# EAGLE board panel (EAGLE 7.3.0), part 1 of 2
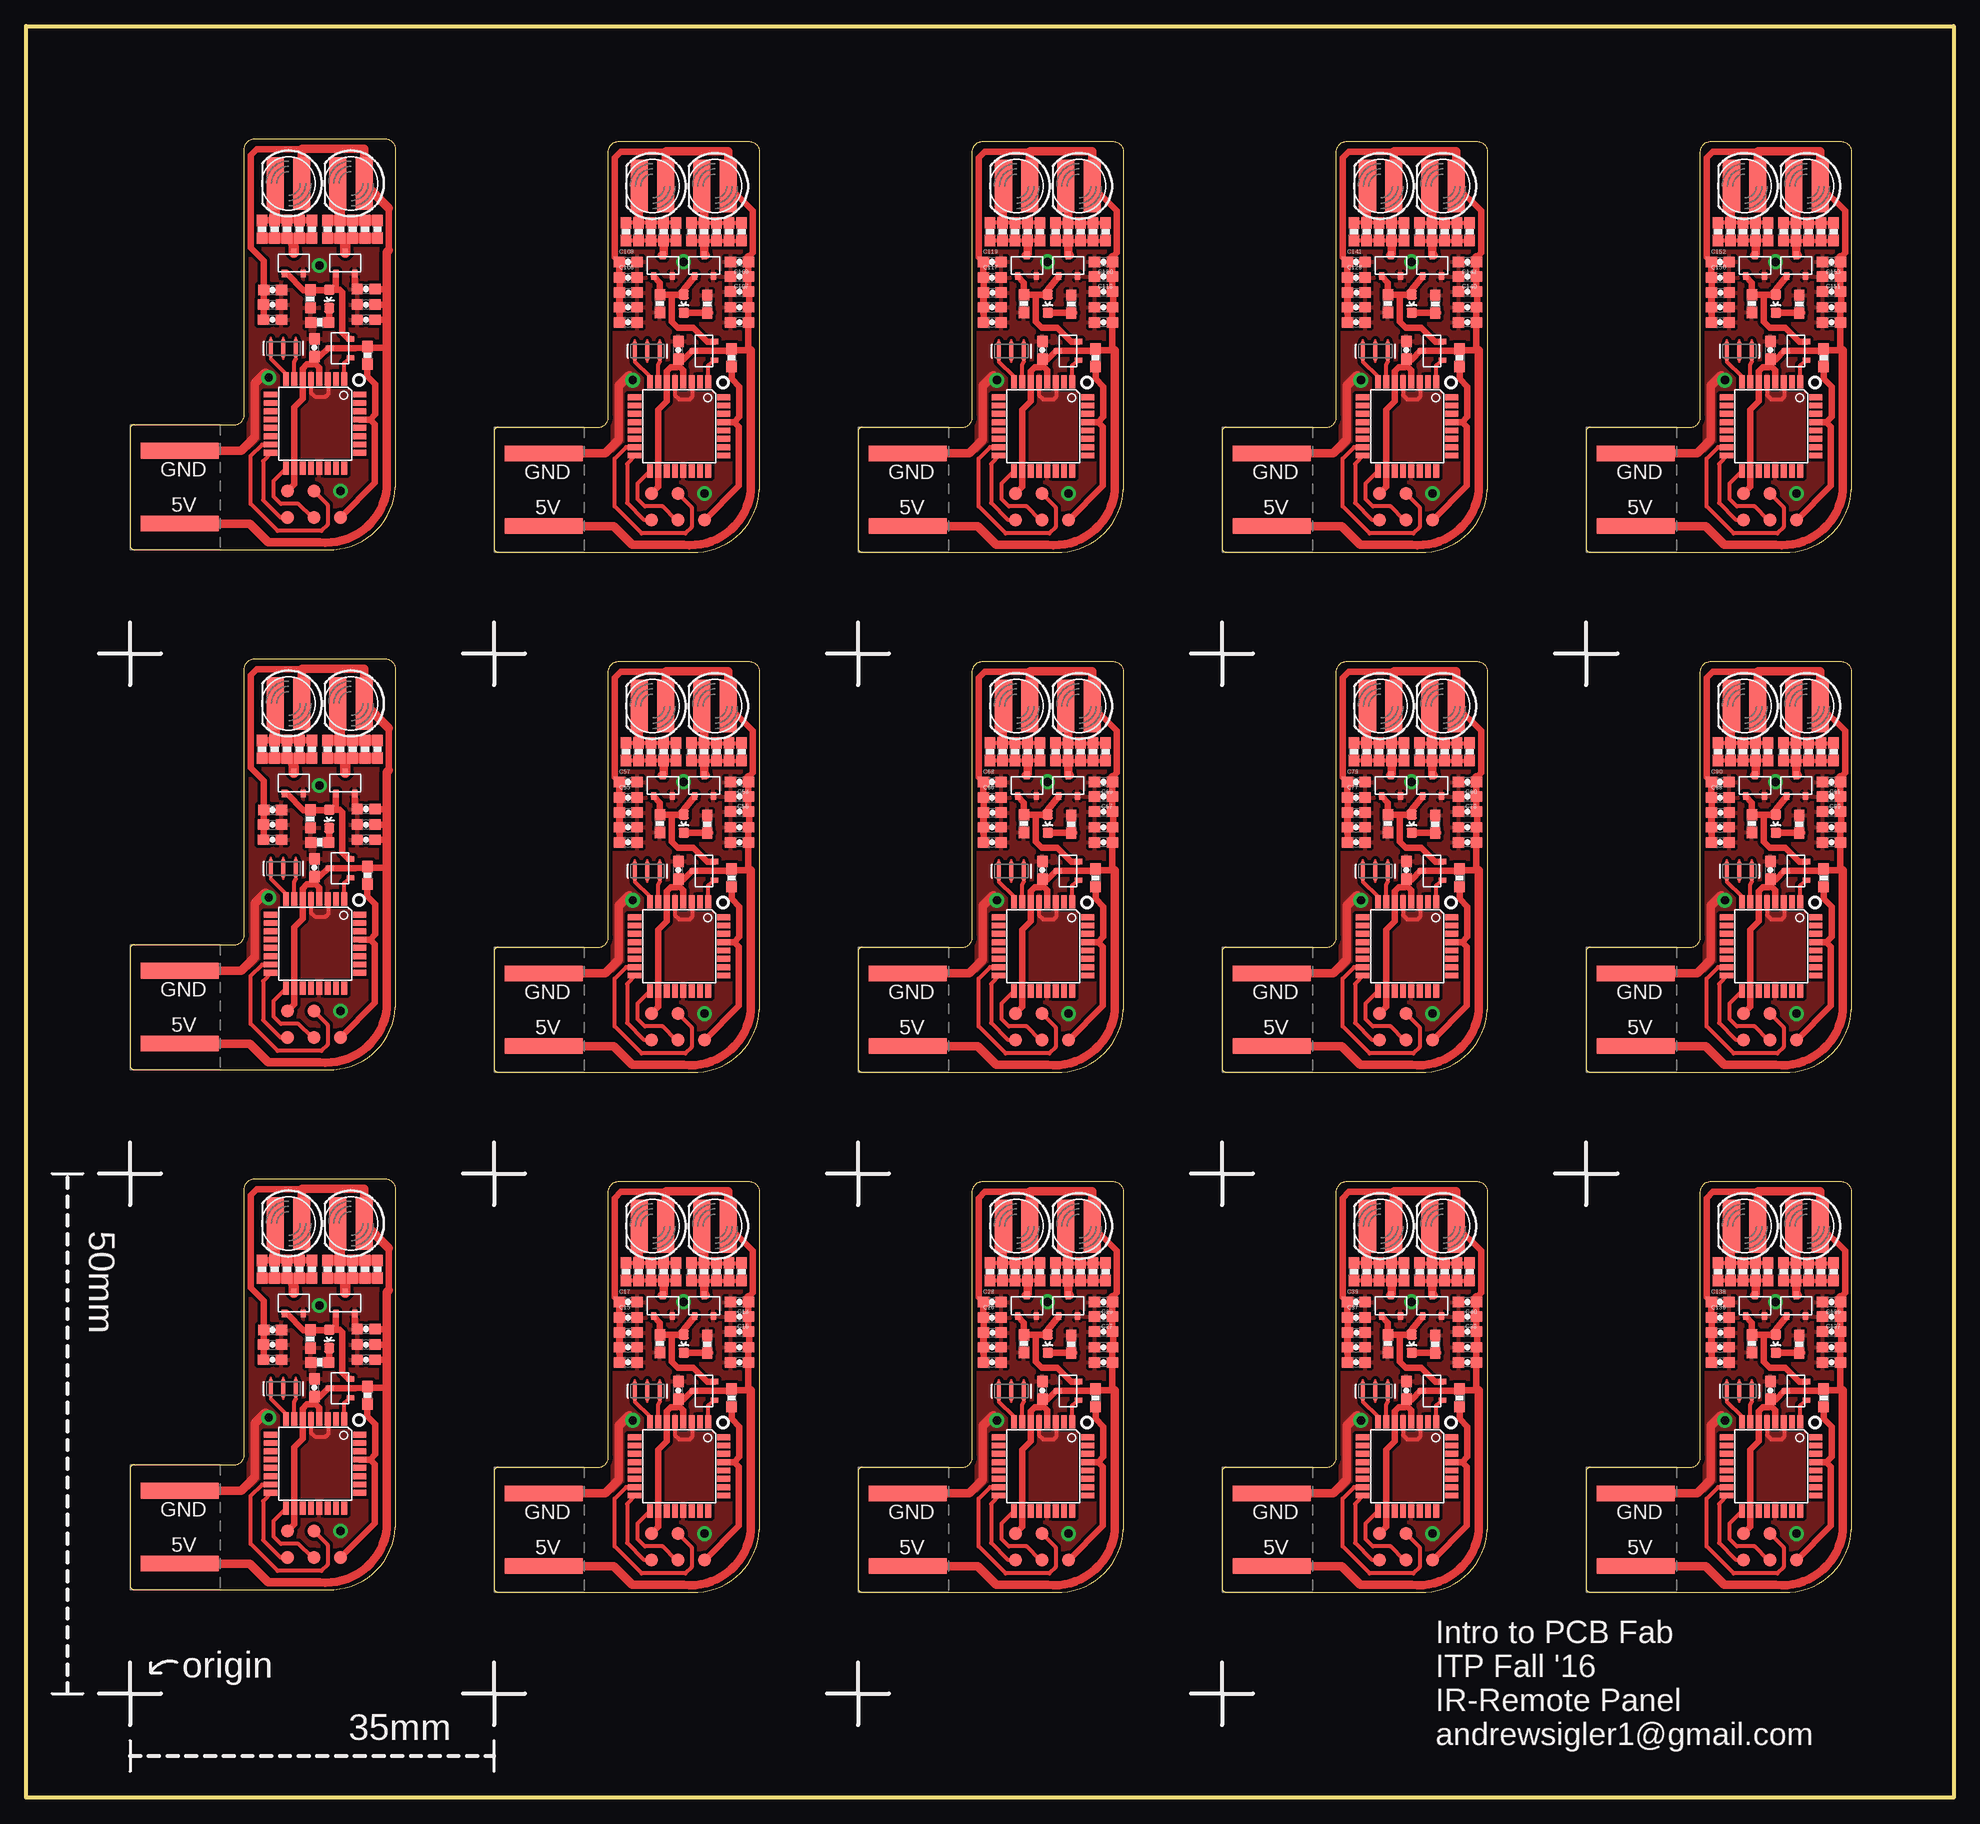
[diagram p0: board, top side]
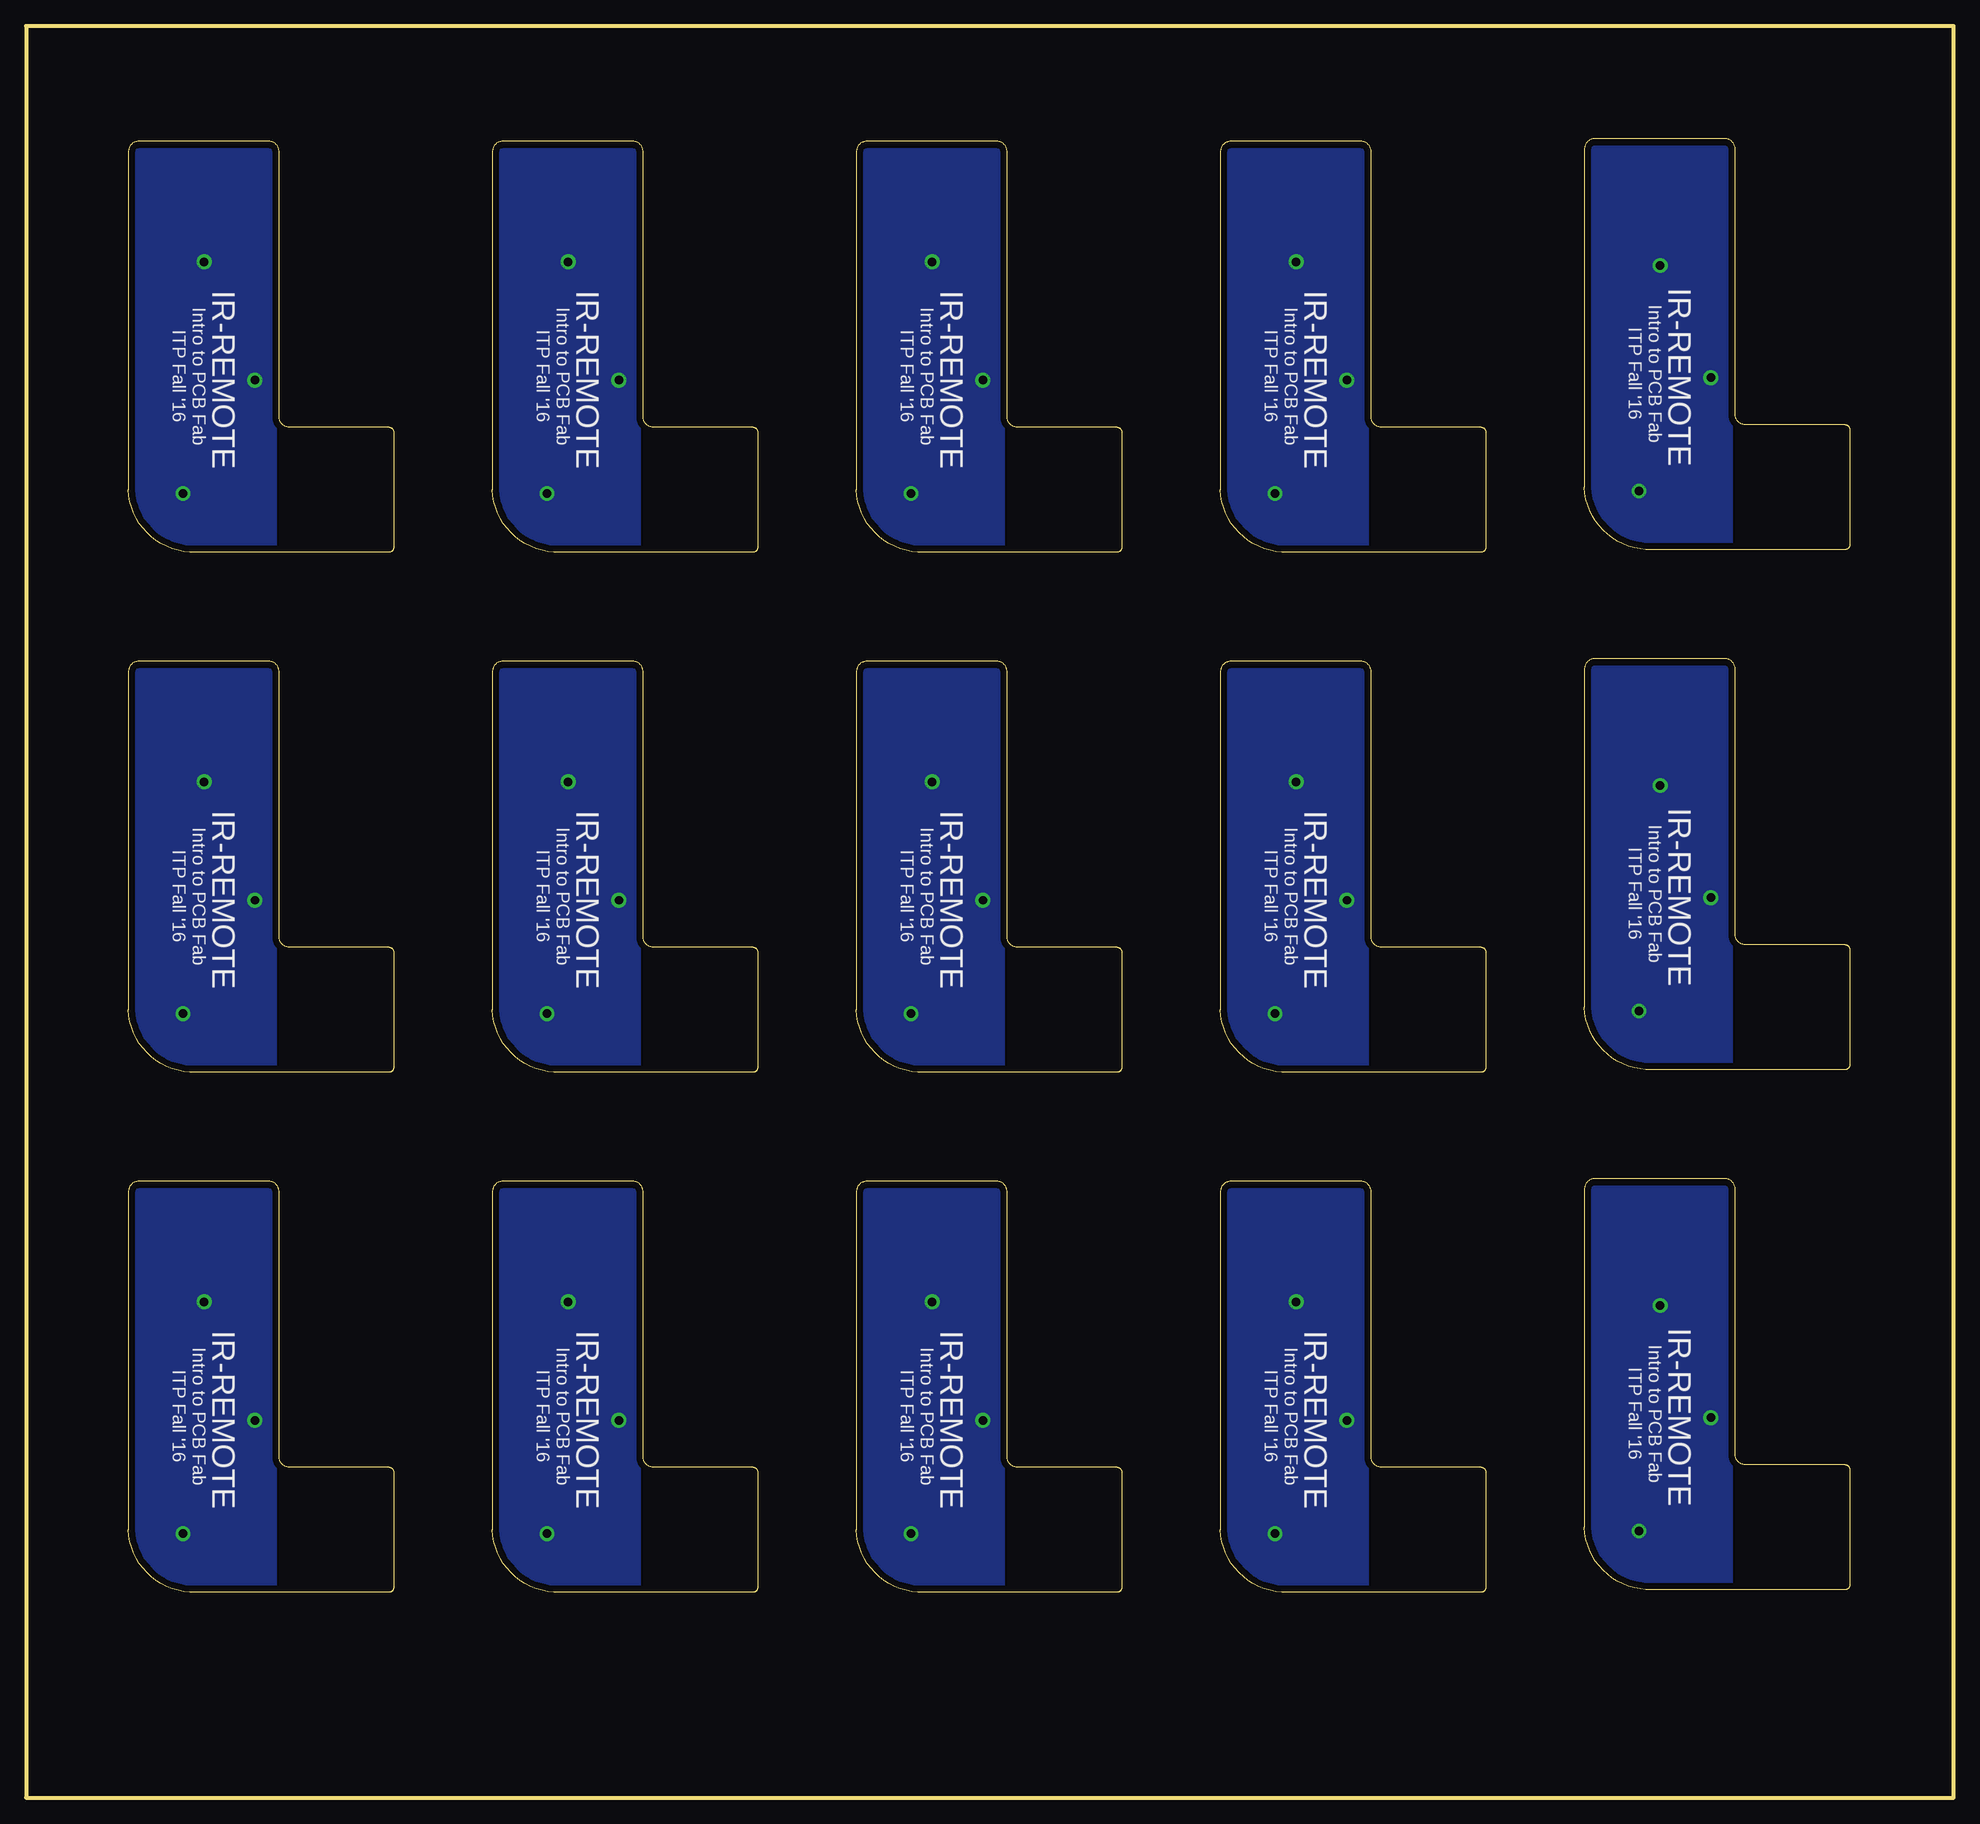
[diagram p1: board, bottom side, seen from below]

Size 185.34 x 170.34 mm. Coordinates in mm from the lower left corner, seen from the top.
Outline: 10.4,32 arc90 10,31.6 10,20.4 arc90 10.4,20 29,20 arc90 35.5,26 35.5,58.5 arc90 34.5,59.5 22,59.5 arc90 21,58.5 21,33 arc-90 20,32 10.4,32
Outline: 0,0 0,170.34 185.34,170.34 185.34,0 0,0
Outline: 45.4,31.75 arc90 45,31.35 45,20.15 arc90 45.4,19.75 64,19.75 arc90 70.5,25.75 70.5,58.25 arc90 69.5,59.25 57,59.25 arc90 56,58.25 56,32.75 arc-90 55,31.75 45.4,31.75
Outline: 80.4,31.75 arc90 80,31.35 80,20.15 arc90 80.4,19.75 99,19.75 arc90 105.5,25.75 105.5,58.25 arc90 104.5,59.25 92,59.25 arc90 91,58.25 91,32.75 arc-90 90,31.75 80.4,31.75
Outline: 115.4,31.75 arc90 115,31.35 115,20.15 arc90 115.4,19.75 134,19.75 arc90 140.5,25.75 140.5,58.25 arc90 139.5,59.25 127,59.25 arc90 126,58.25 126,32.75 arc-90 125,31.75 115.4,31.75
Outline: 150.4,31.75 arc90 150,31.35 150,20.15 arc90 150.4,19.75 169,19.75 arc90 175.5,25.75 175.5,58.25 arc90 174.5,59.25 162,59.25 arc90 161,58.25 161,32.75 arc-90 160,31.75 150.4,31.75
Outline: 10.4,82 arc90 10,81.6 10,70.4 arc90 10.4,70 29,70 arc90 35.5,76 35.5,108.5 arc90 34.5,109.5 22,109.5 arc90 21,108.5 21,83 arc-90 20,82 10.4,82
Outline: 45.4,81.75 arc90 45,81.35 45,70.15 arc90 45.4,69.75 64,69.75 arc90 70.5,75.75 70.5,108.25 arc90 69.5,109.25 57,109.25 arc90 56,108.25 56,82.75 arc-90 55,81.75 45.4,81.75
Outline: 80.4,81.75 arc90 80,81.35 80,70.15 arc90 80.4,69.75 99,69.75 arc90 105.5,75.75 105.5,108.25 arc90 104.5,109.25 92,109.25 arc90 91,108.25 91,82.75 arc-90 90,81.75 80.4,81.75
Outline: 115.4,81.75 arc90 115,81.35 115,70.15 arc90 115.4,69.75 134,69.75 arc90 140.5,75.75 140.5,108.25 arc90 139.5,109.25 127,109.25 arc90 126,108.25 126,82.75 arc-90 125,81.75 115.4,81.75
Outline: 150.4,81.75 arc90 150,81.35 150,70.15 arc90 150.4,69.75 169,69.75 arc90 175.5,75.75 175.5,108.25 arc90 174.5,109.25 162,109.25 arc90 161,108.25 161,82.75 arc-90 160,81.75 150.4,81.75
Outline: 10.4,132 arc90 10,131.6 10,120.4 arc90 10.4,120 29,120 arc90 35.5,126 35.5,158.5 arc90 34.5,159.5 22,159.5 arc90 21,158.5 21,133 arc-90 20,132 10.4,132
Outline: 45.4,131.75 arc90 45,131.35 45,120.15 arc90 45.4,119.75 64,119.75 arc90 70.5,125.75 70.5,158.25 arc90 69.5,159.25 57,159.25 arc90 56,158.25 56,132.75 arc-90 55,131.75 45.4,131.75
Outline: 80.4,131.75 arc90 80,131.35 80,120.15 arc90 80.4,119.75 99,119.75 arc90 105.5,125.75 105.5,158.25 arc90 104.5,159.25 92,159.25 arc90 91,158.25 91,132.75 arc-90 90,131.75 80.4,131.75
Outline: 115.4,131.75 arc90 115,131.35 115,120.15 arc90 115.4,119.75 134,119.75 arc90 140.5,125.75 140.5,158.25 arc90 139.5,159.25 127,159.25 arc90 126,158.25 126,132.75 arc-90 125,131.75 115.4,131.75
Outline: 150.4,131.75 arc90 150,131.35 150,120.15 arc90 150.4,119.75 169,119.75 arc90 175.5,125.75 175.5,158.25 arc90 174.5,159.25 162,159.25 arc90 161,158.25 161,132.75 arc-90 160,131.75 150.4,131.75
Copper layers (1*16): Top 0.0356mm / dielectric 1.5011mm / Bottom 0.0356mm
Design rules "LaenPCBOrder": minimum track width 6mil, minimum drill 13mil, track to track 6mil, track to pad 6mil, pad to pad 6mil, via to via 6mil, smd to smd 6mil, copper to edge 15mil, drill to drill 6mil, minimum pad ring 7mil, minimum via ring 7mil, stop-mask expansion 3mil, vias tented up to drill 0mil, thermal gap 10mil

## Footprints (pad centres in the part's own frame; a part is rotated, then mirrored left to right if it is on the bottom)
PAD.03X.05 = smd 1.27 x 1.27: P$1 0,0
0603-CAP = smd 1.1 x 1: 1 -0.85,0; 2 0.85,0
5MM-SIDE = smd 1.651 x 5.08: A -1.27,0; K 1.27,0
LED-0603 = smd 1 x 1: A 0,-0.877; C 0,0.877
SOT-23-R = smd 0.5 x 0.75: 1-BASE -0.9,-1; 2-COLLECTOR 0,1; 3-EMITTER 0.9,-1
0603-RES = smd 1.1 x 1: 1 -0.85,0; 2 0.85,0
TQFP32-08 = smd 1.27 x 0.559: 1 -4.293,2.8; 2 -4.293,2; 3 -4.293,1.2; 4 -4.293,0.4; 5 -4.293,-0.4; 6 -4.293,-1.2; 7 -4.293,-2; 8 -4.293,-2.8; 17 4.293,-2.8; 18 4.293,-2; 19 4.293,-1.2; 20 4.293,-0.4; 21 4.293,0.4; 22 4.293,1.2; 23 4.293,2; 24 4.293,2.8 | smd 0.559 x 1.27: 9 -2.8,-4.293; 10 -2,-4.293; 11 -1.2,-4.293; 12 -0.4,-4.293; 13 0.4,-4.293; 14 1.2,-4.293; 15 2,-4.293; 16 2.8,-4.293; 25 2.8,4.293; 26 2,4.293; 27 1.2,4.293; 28 0.4,4.293; 29 -0.4,4.293; 30 -1.2,4.293; 31 -2,4.293; 32 -2.8,4.293
USB-A-PCB-POWER-ONLY = smd 7.5 x 1.5: 5V -0.2,-3.5; GND -0.2,3.5
RESONATOR-SMD = smd 0.45 x 1.905: 1 -1.2,0; 2 0,0; 3 1.2,0

## Placement (x,y rotation side)
5V  [PAD.03X.05]  25.16,25.63 180 top
5V1  [PAD.03X.05]  60.16,25.38 180 top
5V2  [PAD.03X.05]  95.16,25.38 180 top
5V3  [PAD.03X.05]  130.16,25.38 180 top
5V4  [PAD.03X.05]  25.16,75.63 180 top
5V5  [PAD.03X.05]  60.16,75.38 180 top
5V6  [PAD.03X.05]  95.16,75.38 180 top
5V7  [PAD.03X.05]  130.16,75.38 180 top
5V8  [PAD.03X.05]  165.16,75.38 180 top
5V9  [PAD.03X.05]  25.16,125.63 180 top
5V10  [PAD.03X.05]  60.16,125.38 180 top
5V11  [PAD.03X.05]  95.16,125.38 180 top
5V12  [PAD.03X.05]  165.16,25.38 180 top
5V13  [PAD.03X.05]  130.16,125.38 180 top
5V14  [PAD.03X.05]  165.16,125.38 180 top
C1  4.7uF  [0603-CAP]  32.7,43.55 180 top
C2  4.7uF  [0603-CAP]  23.7,43.55 0 top
C3  4.7uF  [0603-CAP]  23.72,44.96 0 top
C4  4.7uF  [0603-CAP]  32.7,45.05 180 top
C5  4.7uF  [0603-CAP]  23.7,42.1 0 top
C6  4.7uF  [0603-CAP]  32.7,42.1 180 top
C7  0.1uF  [0603-CAP]  27.73,39.42 90 top
C8  4.7uF  [0603-CAP]  57.92,44.71 0 top
C9  0.1uF  [0603-CAP]  62.73,39.17 90 top
C10  4.7uF  [0603-CAP]  68.6,43.3 180 top
C11  4.7uF  [0603-CAP]  57.9,43.3 0 top
C12  4.7uF  [0603-CAP]  68.6,44.8 180 top
C13  4.7uF  [0603-CAP]  57.9,41.85 0 top
C14  4.7uF  [0603-CAP]  68.6,41.85 180 top
C15  4.7uF  [0603-CAP]  57.9,46.15 0 top
C16  4.7uF  [0603-CAP]  68.6,46.25 180 top
C17  4.7uF  [0603-CAP]  57.9,47.65 0 top
C18  4.7uF  [0603-CAP]  68.6,47.65 180 top
C19  4.7uF  [0603-CAP]  92.92,44.71 0 top
C20  0.1uF  [0603-CAP]  97.72,39.17 90 top
C21  4.7uF  [0603-CAP]  103.6,43.3 180 top
C22  4.7uF  [0603-CAP]  92.9,43.3 0 top
C23  4.7uF  [0603-CAP]  103.6,44.8 180 top
C24  4.7uF  [0603-CAP]  92.9,41.85 0 top
C25  4.7uF  [0603-CAP]  103.6,41.85 180 top
C26  4.7uF  [0603-CAP]  92.9,46.15 0 top
C27  4.7uF  [0603-CAP]  103.6,46.25 180 top
C28  4.7uF  [0603-CAP]  92.9,47.65 0 top
C29  4.7uF  [0603-CAP]  103.6,47.65 180 top
C30  4.7uF  [0603-CAP]  127.92,44.71 0 top
C31  0.1uF  [0603-CAP]  132.72,39.17 90 top
C32  4.7uF  [0603-CAP]  138.6,43.3 180 top
C33  4.7uF  [0603-CAP]  127.9,43.3 0 top
C34  4.7uF  [0603-CAP]  138.6,44.8 180 top
C35  4.7uF  [0603-CAP]  127.9,41.85 0 top
C36  4.7uF  [0603-CAP]  138.6,41.85 180 top
C37  4.7uF  [0603-CAP]  127.9,46.15 0 top
C38  4.7uF  [0603-CAP]  138.6,46.25 180 top
C39  4.7uF  [0603-CAP]  127.9,47.65 0 top
C40  4.7uF  [0603-CAP]  138.6,47.65 180 top
C41  4.7uF  [0603-CAP]  23.72,94.96 0 top
C42  0.1uF  [0603-CAP]  27.73,89.42 90 top
C43  4.7uF  [0603-CAP]  32.7,93.55 180 top
C44  4.7uF  [0603-CAP]  23.7,93.55 0 top
C45  4.7uF  [0603-CAP]  32.7,95.05 180 top
C46  4.7uF  [0603-CAP]  23.7,92.1 0 top
C47  4.7uF  [0603-CAP]  32.7,92.1 180 top
C48  4.7uF  [0603-CAP]  57.92,94.71 0 top
C49  0.1uF  [0603-CAP]  62.73,89.17 90 top
C50  4.7uF  [0603-CAP]  68.6,93.3 180 top
C51  4.7uF  [0603-CAP]  57.9,93.3 0 top
C52  4.7uF  [0603-CAP]  68.6,94.8 180 top
C53  4.7uF  [0603-CAP]  57.9,91.85 0 top
C54  4.7uF  [0603-CAP]  68.6,91.85 180 top
C55  4.7uF  [0603-CAP]  57.9,96.15 0 top
C56  4.7uF  [0603-CAP]  68.6,96.25 180 top
C57  4.7uF  [0603-CAP]  57.9,97.65 0 top
C58  4.7uF  [0603-CAP]  68.6,97.65 180 top
C59  4.7uF  [0603-CAP]  92.92,94.71 0 top
C60  0.1uF  [0603-CAP]  97.72,89.17 90 top
C61  4.7uF  [0603-CAP]  103.6,93.3 180 top
C62  4.7uF  [0603-CAP]  92.9,93.3 0 top
C63  4.7uF  [0603-CAP]  103.6,94.8 180 top
C64  4.7uF  [0603-CAP]  92.9,91.85 0 top
C65  4.7uF  [0603-CAP]  103.6,91.85 180 top
C66  4.7uF  [0603-CAP]  92.9,96.15 0 top
C67  4.7uF  [0603-CAP]  103.6,96.25 180 top
C68  4.7uF  [0603-CAP]  92.9,97.65 0 top
C69  4.7uF  [0603-CAP]  103.6,97.65 180 top
C70  4.7uF  [0603-CAP]  127.92,94.71 0 top
C71  0.1uF  [0603-CAP]  132.72,89.17 90 top
C72  4.7uF  [0603-CAP]  138.6,93.3 180 top
C73  4.7uF  [0603-CAP]  127.9,93.3 0 top
C74  4.7uF  [0603-CAP]  138.6,94.8 180 top
C75  4.7uF  [0603-CAP]  127.9,91.85 0 top
C76  4.7uF  [0603-CAP]  138.6,91.85 180 top
C77  4.7uF  [0603-CAP]  127.9,96.15 0 top
C78  4.7uF  [0603-CAP]  138.6,96.25 180 top
C79  4.7uF  [0603-CAP]  127.9,97.65 0 top
C80  4.7uF  [0603-CAP]  138.6,97.65 180 top
C81  4.7uF  [0603-CAP]  162.92,94.71 0 top
C82  0.1uF  [0603-CAP]  167.72,89.17 90 top
C83  4.7uF  [0603-CAP]  173.6,93.3 180 top
C84  4.7uF  [0603-CAP]  162.9,93.3 0 top
C85  4.7uF  [0603-CAP]  173.6,94.8 180 top
C86  4.7uF  [0603-CAP]  162.9,91.85 0 top
C87  4.7uF  [0603-CAP]  173.6,91.85 180 top
C88  4.7uF  [0603-CAP]  162.9,96.15 0 top
C89  4.7uF  [0603-CAP]  173.6,96.25 180 top
C90  4.7uF  [0603-CAP]  162.9,97.65 0 top
C91  4.7uF  [0603-CAP]  173.6,97.65 180 top
C92  4.7uF  [0603-CAP]  23.72,144.96 0 top
C93  0.1uF  [0603-CAP]  27.73,139.42 90 top
C94  4.7uF  [0603-CAP]  32.7,143.55 180 top
C95  4.7uF  [0603-CAP]  23.7,143.55 0 top
C96  4.7uF  [0603-CAP]  32.7,145.05 180 top
C97  4.7uF  [0603-CAP]  23.7,142.1 0 top
C98  4.7uF  [0603-CAP]  32.7,142.1 180 top
C99  4.7uF  [0603-CAP]  57.92,144.71 0 top
C100  0.1uF  [0603-CAP]  62.73,139.17 90 top
C101  4.7uF  [0603-CAP]  68.6,143.3 180 top
C102  4.7uF  [0603-CAP]  57.9,143.3 0 top
C103  4.7uF  [0603-CAP]  68.6,144.8 180 top
C104  4.7uF  [0603-CAP]  57.9,141.85 0 top
C105  4.7uF  [0603-CAP]  68.6,141.85 180 top
C106  4.7uF  [0603-CAP]  57.9,146.15 0 top
C107  4.7uF  [0603-CAP]  68.6,146.25 180 top
C108  4.7uF  [0603-CAP]  57.9,147.65 0 top
C109  4.7uF  [0603-CAP]  68.6,147.65 180 top
C110  4.7uF  [0603-CAP]  92.92,144.71 0 top
C111  0.1uF  [0603-CAP]  97.72,139.17 90 top
C112  4.7uF  [0603-CAP]  103.6,143.3 180 top
C113  4.7uF  [0603-CAP]  92.9,143.3 0 top
C114  4.7uF  [0603-CAP]  103.6,144.8 180 top
C115  4.7uF  [0603-CAP]  92.9,141.85 0 top
C116  4.7uF  [0603-CAP]  103.6,141.85 180 top
C117  4.7uF  [0603-CAP]  92.9,146.15 0 top
C118  4.7uF  [0603-CAP]  103.6,146.25 180 top
C119  4.7uF  [0603-CAP]  92.9,147.65 0 top
C120  4.7uF  [0603-CAP]  103.6,147.65 180 top
C121  4.7uF  [0603-CAP]  127.92,144.71 0 top
C122  0.1uF  [0603-CAP]  132.72,139.17 90 top
C123  4.7uF  [0603-CAP]  138.6,143.3 180 top
C124  4.7uF  [0603-CAP]  127.9,143.3 0 top
C125  4.7uF  [0603-CAP]  138.6,144.8 180 top
C126  4.7uF  [0603-CAP]  127.9,141.85 0 top
C127  4.7uF  [0603-CAP]  138.6,141.85 180 top
C128  4.7uF  [0603-CAP]  127.9,146.15 0 top
C129  4.7uF  [0603-CAP]  162.92,44.71 0 top
C130  0.1uF  [0603-CAP]  167.72,39.17 90 top
C131  4.7uF  [0603-CAP]  173.6,43.3 180 top
C132  4.7uF  [0603-CAP]  162.9,43.3 0 top
C133  4.7uF  [0603-CAP]  173.6,44.8 180 top
C134  4.7uF  [0603-CAP]  162.9,41.85 0 top
C135  4.7uF  [0603-CAP]  173.6,41.85 180 top
C136  4.7uF  [0603-CAP]  162.9,46.15 0 top
C137  4.7uF  [0603-CAP]  173.6,46.25 180 top
C138  4.7uF  [0603-CAP]  162.9,47.65 0 top
C139  4.7uF  [0603-CAP]  173.6,47.65 180 top
C140  4.7uF  [0603-CAP]  138.6,146.25 180 top
C141  4.7uF  [0603-CAP]  127.9,147.65 0 top
C142  4.7uF  [0603-CAP]  138.6,147.65 180 top
C143  4.7uF  [0603-CAP]  162.92,144.71 0 top
C144  0.1uF  [0603-CAP]  167.72,139.17 90 top
C145  4.7uF  [0603-CAP]  173.6,143.3 180 top
C146  4.7uF  [0603-CAP]  162.9,143.3 0 top
C147  4.7uF  [0603-CAP]  173.6,144.8 180 top
C148  4.7uF  [0603-CAP]  162.9,141.85 0 top
C149  4.7uF  [0603-CAP]  173.6,141.85 180 top
C150  4.7uF  [0603-CAP]  162.9,146.15 0 top
C151  4.7uF  [0603-CAP]  173.6,146.25 180 top
C152  4.7uF  [0603-CAP]  162.9,147.65 0 top
C153  4.7uF  [0603-CAP]  173.6,147.65 180 top
LED1  LED  [5MM-SIDE]  25.25,55.2 180 top
LED2  LED  [5MM-SIDE]  66.25,54.95 180 top
LED3  LED  [5MM-SIDE]  31.25,55.2 180 top
LED4  [LED-0603]  29.15,44.1 180 top
LED5  [LED-0603]  63.25,43.65 180 top
LED6  LED  [5MM-SIDE]  60.25,54.95 180 top
LED7  LED  [5MM-SIDE]  101.25,54.95 180 top
LED8  [LED-0603]  98.25,43.65 180 top
LED9  LED  [5MM-SIDE]  95.25,54.95 180 top
LED10  LED  [5MM-SIDE]  136.25,54.95 180 top
LED11  [LED-0603]  133.25,43.65 180 top
LED12  LED  [5MM-SIDE]  130.25,54.95 180 top
LED13  LED  [5MM-SIDE]  31.25,105.2 180 top
LED14  [LED-0603]  29.15,94.1 180 top
LED15  LED  [5MM-SIDE]  25.25,105.2 180 top
LED16  LED  [5MM-SIDE]  66.25,104.95 180 top
LED17  [LED-0603]  63.25,93.65 180 top
LED18  LED  [5MM-SIDE]  60.25,104.95 180 top
LED19  LED  [5MM-SIDE]  101.25,104.95 180 top
LED20  [LED-0603]  98.25,93.65 180 top
LED21  LED  [5MM-SIDE]  95.25,104.95 180 top
LED22  LED  [5MM-SIDE]  136.25,104.95 180 top
LED23  [LED-0603]  133.25,93.65 180 top
LED24  LED  [5MM-SIDE]  130.25,104.95 180 top
LED25  LED  [5MM-SIDE]  171.25,104.95 180 top
LED26  [LED-0603]  168.25,93.65 180 top
LED27  LED  [5MM-SIDE]  165.25,104.95 180 top
LED28  LED  [5MM-SIDE]  31.25,155.2 180 top
LED29  [LED-0603]  29.15,144.1 180 top
LED30  LED  [5MM-SIDE]  25.25,155.2 180 top
LED31  LED  [5MM-SIDE]  66.25,154.95 180 top
LED32  [LED-0603]  63.25,143.65 180 top
LED33  LED  [5MM-SIDE]  60.25,154.95 180 top
LED34  LED  [5MM-SIDE]  101.25,154.95 180 top
LED35  [LED-0603]  98.25,143.65 180 top
LED36  LED  [5MM-SIDE]  95.25,154.95 180 top
LED37  LED  [5MM-SIDE]  171.25,54.95 180 top
LED38  [LED-0603]  168.25,43.65 180 top
LED39  LED  [5MM-SIDE]  165.25,54.95 180 top
LED40  LED  [5MM-SIDE]  136.25,154.95 180 top
LED41  [LED-0603]  133.25,143.65 180 top
LED42  LED  [5MM-SIDE]  130.25,154.95 180 top
LED43  LED  [5MM-SIDE]  171.25,154.95 180 top
LED44  [LED-0603]  168.25,143.65 180 top
LED45  LED  [5MM-SIDE]  165.25,154.95 180 top
MISO  [PAD.03X.05]  25.16,23.09 180 top
MISO1  [PAD.03X.05]  60.16,22.84 180 top
MISO2  [PAD.03X.05]  95.16,22.84 180 top
MISO3  [PAD.03X.05]  130.16,22.84 180 top
MISO4  [PAD.03X.05]  25.16,73.09 180 top
MISO5  [PAD.03X.05]  60.16,72.84 180 top
MISO6  [PAD.03X.05]  95.16,72.84 180 top
MISO7  [PAD.03X.05]  130.16,72.84 180 top
MISO8  [PAD.03X.05]  165.16,72.84 180 top
MISO9  [PAD.03X.05]  25.16,123.09 180 top
MISO10  [PAD.03X.05]  60.16,122.84 180 top
MISO11  [PAD.03X.05]  95.16,122.84 180 top
MISO12  [PAD.03X.05]  165.16,22.84 180 top
MISO13  [PAD.03X.05]  130.16,122.84 180 top
MISO14  [PAD.03X.05]  165.16,122.84 180 top
MOSI  [PAD.03X.05]  27.7,25.63 180 top
MOSI1  [PAD.03X.05]  62.7,25.38 180 top
MOSI2  [PAD.03X.05]  97.7,25.38 180 top
MOSI3  [PAD.03X.05]  132.7,25.38 180 top
MOSI4  [PAD.03X.05]  27.7,75.63 180 top
MOSI5  [PAD.03X.05]  62.7,75.38 180 top
MOSI6  [PAD.03X.05]  97.7,75.38 180 top
MOSI7  [PAD.03X.05]  132.7,75.38 180 top
MOSI8  [PAD.03X.05]  167.7,75.38 180 top
MOSI9  [PAD.03X.05]  27.7,125.63 180 top
MOSI10  [PAD.03X.05]  62.7,125.38 180 top
MOSI11  [PAD.03X.05]  97.7,125.38 180 top
MOSI12  [PAD.03X.05]  167.7,25.38 180 top
MOSI13  [PAD.03X.05]  132.7,125.38 180 top
MOSI14  [PAD.03X.05]  167.7,125.38 180 top
Q1  [SOT-23-R]  30.2,39.35 90 top
Q2  [SOT-23-R]  25.75,47.55 0 top
Q3  [SOT-23-R]  65.2,47.3 0 top
Q4  [SOT-23-R]  61.25,47.3 0 top
Q5  [SOT-23-R]  65.2,39.1 90 top
Q6  [SOT-23-R]  100.2,47.3 0 top
Q7  [SOT-23-R]  96.25,47.3 0 top
Q8  [SOT-23-R]  100.2,39.1 90 top
Q9  [SOT-23-R]  30.7,47.55 0 top
Q10  [SOT-23-R]  135.2,47.3 0 top
Q11  [SOT-23-R]  131.25,47.3 0 top
Q12  [SOT-23-R]  135.2,39.1 90 top
Q13  [SOT-23-R]  30.7,97.55 0 top
Q14  [SOT-23-R]  25.75,97.55 0 top
Q15  [SOT-23-R]  30.2,89.35 90 top
Q16  [SOT-23-R]  65.2,97.3 0 top
Q17  [SOT-23-R]  61.25,97.3 0 top
Q18  [SOT-23-R]  65.2,89.1 90 top
Q19  [SOT-23-R]  100.2,97.3 0 top
Q20  [SOT-23-R]  96.25,97.3 0 top
Q21  [SOT-23-R]  100.2,89.1 90 top
Q22  [SOT-23-R]  135.2,97.3 0 top
Q23  [SOT-23-R]  131.25,97.3 0 top
Q24  [SOT-23-R]  135.2,89.1 90 top
Q25  [SOT-23-R]  170.2,97.3 0 top
Q26  [SOT-23-R]  166.25,97.3 0 top
Q27  [SOT-23-R]  170.2,89.1 90 top
Q28  [SOT-23-R]  30.7,147.55 0 top
Q29  [SOT-23-R]  25.75,147.55 0 top
Q30  [SOT-23-R]  30.2,139.35 90 top
Q31  [SOT-23-R]  65.2,147.3 0 top
Q32  [SOT-23-R]  61.25,147.3 0 top
Q33  [SOT-23-R]  65.2,139.1 90 top
Q34  [SOT-23-R]  100.2,147.3 0 top
Q35  [SOT-23-R]  96.25,147.3 0 top
Q36  [SOT-23-R]  100.2,139.1 90 top
Q37  [SOT-23-R]  170.2,47.3 0 top
Q38  [SOT-23-R]  166.25,47.3 0 top
Q39  [SOT-23-R]  170.2,39.1 90 top
Q40  [SOT-23-R]  135.2,147.3 0 top
Q41  [SOT-23-R]  131.25,147.3 0 top
Q42  [SOT-23-R]  135.2,139.1 90 top
Q43  [SOT-23-R]  170.2,147.3 0 top
Q44  [SOT-23-R]  166.25,147.3 0 top
Q45  [SOT-23-R]  170.2,139.1 90 top
R1  1k  [0603-RES]  28.25,41.85 0 top
R2  100  [0603-RES]  29,50.8 90 top
R3  100  [0603-RES]  30.2,50.8 90 top
R4  100  [0603-RES]  31.4,50.8 90 top
R5  10k  [0603-RES]  32.83,38.68 270 top
R6  10k  [0603-RES]  27.35,44.1 90 top
R7  100  [0603-RES]  32.6,50.8 90 top
R8  100  [0603-RES]  33.8,50.8 90 top
R9  100  [0603-RES]  27.5,50.8 90 top
R10  100  [0603-RES]  22.7,50.8 90 top
R11  100  [0603-RES]  25.1,50.8 90 top
R12  100  [0603-RES]  23.9,50.8 90 top
R13  100  [0603-RES]  26.3,50.8 90 top
R14  10k  [0603-RES]  60.95,43.65 90 top
R15  1k  [0603-RES]  65.5,43.6 270 top
R16  10k  [0603-RES]  67.83,38.43 270 top
R17  100  [0603-RES]  64,50.55 90 top
R18  100  [0603-RES]  65.2,50.55 90 top
R19  100  [0603-RES]  66.4,50.55 90 top
R20  100  [0603-RES]  67.6,50.55 90 top
R21  100  [0603-RES]  68.8,50.55 90 top
R22  100  [0603-RES]  62.5,50.55 90 top
R23  100  [0603-RES]  57.7,50.55 90 top
R24  100  [0603-RES]  60.1,50.55 90 top
R25  100  [0603-RES]  58.9,50.55 90 top
R26  100  [0603-RES]  61.3,50.55 90 top
R27  10k  [0603-RES]  95.95,43.65 90 top
R28  1k  [0603-RES]  100.5,43.6 270 top
R29  10k  [0603-RES]  102.83,38.43 270 top
R30  100  [0603-RES]  99,50.55 90 top
R31  100  [0603-RES]  100.2,50.55 90 top
R32  100  [0603-RES]  101.4,50.55 90 top
R33  100  [0603-RES]  102.6,50.55 90 top
R34  100  [0603-RES]  103.8,50.55 90 top
R35  100  [0603-RES]  97.5,50.55 90 top
R36  100  [0603-RES]  92.7,50.55 90 top
R37  100  [0603-RES]  95.1,50.55 90 top
R38  100  [0603-RES]  93.9,50.55 90 top
R39  100  [0603-RES]  96.3,50.55 90 top
R40  10k  [0603-RES]  130.95,43.65 90 top
R41  1k  [0603-RES]  135.5,43.6 270 top
R42  10k  [0603-RES]  137.83,38.43 270 top
R43  100  [0603-RES]  134,50.55 90 top
R44  100  [0603-RES]  135.2,50.55 90 top
R45  100  [0603-RES]  136.4,50.55 90 top
R46  100  [0603-RES]  137.6,50.55 90 top
R47  100  [0603-RES]  138.8,50.55 90 top
R48  100  [0603-RES]  132.5,50.55 90 top
R49  100  [0603-RES]  127.7,50.55 90 top
R50  100  [0603-RES]  130.1,50.55 90 top
R51  100  [0603-RES]  128.9,50.55 90 top
R52  100  [0603-RES]  131.3,50.55 90 top
R53  10k  [0603-RES]  27.35,94.1 90 top
R54  1k  [0603-RES]  28.25,91.85 0 top
R55  10k  [0603-RES]  32.83,88.68 270 top
R56  100  [0603-RES]  29,100.8 90 top
R57  100  [0603-RES]  30.2,100.8 90 top
R58  100  [0603-RES]  31.4,100.8 90 top
R59  100  [0603-RES]  32.6,100.8 90 top
R60  100  [0603-RES]  33.8,100.8 90 top
R61  100  [0603-RES]  27.5,100.8 90 top
R62  100  [0603-RES]  22.7,100.8 90 top
R63  100  [0603-RES]  25.1,100.8 90 top
R64  100  [0603-RES]  23.9,100.8 90 top
R65  100  [0603-RES]  26.3,100.8 90 top
R66  10k  [0603-RES]  60.95,93.65 90 top
R67  1k  [0603-RES]  65.5,93.6 270 top
R68  10k  [0603-RES]  67.83,88.43 270 top
R69  100  [0603-RES]  64,100.55 90 top
R70  100  [0603-RES]  65.2,100.55 90 top
R71  100  [0603-RES]  66.4,100.55 90 top
R72  100  [0603-RES]  67.6,100.55 90 top
R73  100  [0603-RES]  68.8,100.55 90 top
R74  100  [0603-RES]  62.5,100.55 90 top
R75  100  [0603-RES]  57.7,100.55 90 top
R76  100  [0603-RES]  60.1,100.55 90 top
R77  100  [0603-RES]  58.9,100.55 90 top
R78  100  [0603-RES]  61.3,100.55 90 top
R79  10k  [0603-RES]  95.95,93.65 90 top
R80  1k  [0603-RES]  100.5,93.6 270 top
R81  10k  [0603-RES]  102.83,88.43 270 top
R82  100  [0603-RES]  99,100.55 90 top
R83  100  [0603-RES]  100.2,100.55 90 top
R84  100  [0603-RES]  101.4,100.55 90 top
R85  100  [0603-RES]  102.6,100.55 90 top
R86  100  [0603-RES]  103.8,100.55 90 top
R87  100  [0603-RES]  97.5,100.55 90 top
R88  100  [0603-RES]  92.7,100.55 90 top
R89  100  [0603-RES]  95.1,100.55 90 top
R90  100  [0603-RES]  93.9,100.55 90 top
R91  100  [0603-RES]  96.3,100.55 90 top
R92  10k  [0603-RES]  130.95,93.65 90 top
R93  1k  [0603-RES]  135.5,93.6 270 top
R94  10k  [0603-RES]  137.83,88.43 270 top
R95  100  [0603-RES]  134,100.55 90 top
R96  100  [0603-RES]  135.2,100.55 90 top
R97  100  [0603-RES]  136.4,100.55 90 top
R98  100  [0603-RES]  137.6,100.55 90 top
R99  100  [0603-RES]  138.8,100.55 90 top
R100  100  [0603-RES]  132.5,100.55 90 top
R101  100  [0603-RES]  127.7,100.55 90 top
R102  100  [0603-RES]  130.1,100.55 90 top
R103  100  [0603-RES]  128.9,100.55 90 top
R104  100  [0603-RES]  131.3,100.55 90 top
R105  10k  [0603-RES]  165.95,93.65 90 top
R106  1k  [0603-RES]  170.5,93.6 270 top
R107  10k  [0603-RES]  172.83,88.43 270 top
R108  100  [0603-RES]  169,100.55 90 top
R109  100  [0603-RES]  170.2,100.55 90 top
R110  100  [0603-RES]  171.4,100.55 90 top
R111  100  [0603-RES]  172.6,100.55 90 top
R112  100  [0603-RES]  173.8,100.55 90 top
R113  100  [0603-RES]  167.5,100.55 90 top
R114  100  [0603-RES]  162.7,100.55 90 top
R115  100  [0603-RES]  165.1,100.55 90 top
R116  100  [0603-RES]  163.9,100.55 90 top
R117  100  [0603-RES]  166.3,100.55 90 top
R118  10k  [0603-RES]  27.35,144.1 90 top
R119  1k  [0603-RES]  28.25,141.85 0 top
R120  10k  [0603-RES]  32.83,138.68 270 top
R121  100  [0603-RES]  29,150.8 90 top
R122  100  [0603-RES]  30.2,150.8 90 top
R123  100  [0603-RES]  31.4,150.8 90 top
R124  100  [0603-RES]  32.6,150.8 90 top
R125  100  [0603-RES]  33.8,150.8 90 top
R126  100  [0603-RES]  27.5,150.8 90 top
R127  100  [0603-RES]  22.7,150.8 90 top
R128  100  [0603-RES]  25.1,150.8 90 top
R129  100  [0603-RES]  23.9,150.8 90 top
R130  100  [0603-RES]  26.3,150.8 90 top
R131  10k  [0603-RES]  60.95,143.65 90 top
R132  1k  [0603-RES]  65.5,143.6 270 top
R133  10k  [0603-RES]  67.83,138.43 270 top
R134  100  [0603-RES]  64,150.55 90 top
R135  100  [0603-RES]  65.2,150.55 90 top
R136  100  [0603-RES]  66.4,150.55 90 top
R137  100  [0603-RES]  67.6,150.55 90 top
R138  100  [0603-RES]  68.8,150.55 90 top
R139  100  [0603-RES]  62.5,150.55 90 top
R140  100  [0603-RES]  57.7,150.55 90 top
R141  100  [0603-RES]  60.1,150.55 90 top
R142  100  [0603-RES]  58.9,150.55 90 top
R143  100  [0603-RES]  61.3,150.55 90 top
R144  10k  [0603-RES]  95.95,143.65 90 top
R145  1k  [0603-RES]  100.5,143.6 270 top
R146  10k  [0603-RES]  102.83,138.43 270 top
R147  100  [0603-RES]  99,150.55 90 top
R148  100  [0603-RES]  100.2,150.55 90 top
R149  100  [0603-RES]  101.4,150.55 90 top
R150  100  [0603-RES]  102.6,150.55 90 top
R151  100  [0603-RES]  103.8,150.55 90 top
R152  100  [0603-RES]  97.5,150.55 90 top
R153  100  [0603-RES]  92.7,150.55 90 top
R154  100  [0603-RES]  95.1,150.55 90 top
R155  100  [0603-RES]  93.9,150.55 90 top
R156  100  [0603-RES]  96.3,150.55 90 top
R157  10k  [0603-RES]  165.95,43.65 90 top
R158  1k  [0603-RES]  170.5,43.6 270 top
R159  10k  [0603-RES]  172.83,38.43 270 top
R160  100  [0603-RES]  169,50.55 90 top
R161  100  [0603-RES]  170.2,50.55 90 top
R162  100  [0603-RES]  171.4,50.55 90 top
R163  100  [0603-RES]  172.6,50.55 90 top
R164  100  [0603-RES]  173.8,50.55 90 top
R165  100  [0603-RES]  167.5,50.55 90 top
R166  100  [0603-RES]  162.7,50.55 90 top
R167  100  [0603-RES]  165.1,50.55 90 top
R168  100  [0603-RES]  163.9,50.55 90 top
R169  100  [0603-RES]  166.3,50.55 90 top
R170  10k  [0603-RES]  130.95,143.65 90 top
R171  1k  [0603-RES]  135.5,143.6 270 top
R172  10k  [0603-RES]  137.83,138.43 270 top
R173  100  [0603-RES]  134,150.55 90 top
R174  100  [0603-RES]  135.2,150.55 90 top
R175  100  [0603-RES]  136.4,150.55 90 top
R176  100  [0603-RES]  137.6,150.55 90 top
R177  100  [0603-RES]  138.8,150.55 90 top
R178  100  [0603-RES]  132.5,150.55 90 top
R179  100  [0603-RES]  127.7,150.55 90 top
R180  100  [0603-RES]  130.1,150.55 90 top
R181  100  [0603-RES]  128.9,150.55 90 top
R182  100  [0603-RES]  131.3,150.55 90 top
R183  10k  [0603-RES]  165.95,143.65 90 top
R184  1k  [0603-RES]  170.5,143.6 270 top
R185  10k  [0603-RES]  172.83,138.43 270 top
R186  100  [0603-RES]  169,150.55 90 top
R187  100  [0603-RES]  170.2,150.55 90 top
R188  100  [0603-RES]  171.4,150.55 90 top
R189  100  [0603-RES]  172.6,150.55 90 top
R190  100  [0603-RES]  173.8,150.55 90 top
R191  100  [0603-RES]  167.5,150.55 90 top
R192  100  [0603-RES]  162.7,150.55 90 top
R193  100  [0603-RES]  165.1,150.55 90 top
R194  100  [0603-RES]  163.9,150.55 90 top
R195  100  [0603-RES]  166.3,150.55 90 top
RST  [PAD.03X.05]  30.24,23.09 180 top
RST1  [PAD.03X.05]  65.24,22.84 180 top
RST2  [PAD.03X.05]  100.24,22.84 180 top
RST3  [PAD.03X.05]  135.24,22.84 180 top
RST4  [PAD.03X.05]  30.24,73.09 180 top
RST5  [PAD.03X.05]  65.24,72.84 180 top
RST6  [PAD.03X.05]  100.24,72.84 180 top
RST7  [PAD.03X.05]  135.24,72.84 180 top
RST8  [PAD.03X.05]  170.24,72.84 180 top
RST9  [PAD.03X.05]  30.24,123.09 180 top
RST10  [PAD.03X.05]  65.24,122.84 180 top
RST11  [PAD.03X.05]  100.24,122.84 180 top
RST12  [PAD.03X.05]  170.24,22.84 180 top
RST13  [PAD.03X.05]  135.24,122.84 180 top
RST14  [PAD.03X.05]  170.24,122.84 180 top
SCK  [PAD.03X.05]  27.7,23.09 180 top
SCK1  [PAD.03X.05]  62.7,22.84 180 top
SCK2  [PAD.03X.05]  97.7,22.84 180 top
SCK3  [PAD.03X.05]  132.7,22.84 180 top
SCK4  [PAD.03X.05]  27.7,73.09 180 top
SCK5  [PAD.03X.05]  62.7,72.84 180 top
SCK6  [PAD.03X.05]  97.7,72.84 180 top
SCK7  [PAD.03X.05]  132.7,72.84 180 top
SCK8  [PAD.03X.05]  167.7,72.84 180 top
SCK9  [PAD.03X.05]  27.7,123.09 180 top
SCK10  [PAD.03X.05]  62.7,122.84 180 top
SCK11  [PAD.03X.05]  97.7,122.84 180 top
SCK12  [PAD.03X.05]  167.7,22.84 180 top
SCK13  [PAD.03X.05]  132.7,122.84 180 top
SCK14  [PAD.03X.05]  167.7,122.84 180 top
U1  ATMEGA328P  [TQFP32-08]  27.8,32.1 270 top
U2  ATMEGA328P  [TQFP32-08]  62.8,31.85 270 top
U3  ATMEGA328P  [TQFP32-08]  97.8,31.85 270 top
U4  ATMEGA328P  [TQFP32-08]  132.8,31.85 270 top
U5  ATMEGA328P  [TQFP32-08]  27.8,82.1 270 top
U6  ATMEGA328P  [TQFP32-08]  62.8,81.85 270 top
U7  ATMEGA328P  [TQFP32-08]  97.8,81.85 270 top
U8  ATMEGA328P  [TQFP32-08]  132.8,81.85 270 top
U9  ATMEGA328P  [TQFP32-08]  167.8,81.85 270 top
U10  ATMEGA328P  [TQFP32-08]  27.8,132.1 270 top
U11  ATMEGA328P  [TQFP32-08]  62.8,131.85 270 top
U12  ATMEGA328P  [TQFP32-08]  97.8,131.85 270 top
U13  ATMEGA328P  [TQFP32-08]  167.8,31.85 270 top
U14  ATMEGA328P  [TQFP32-08]  132.8,131.85 270 top
U15  ATMEGA328P  [TQFP32-08]  167.8,131.85 270 top
U$1  USB-POWER-ONLY  [USB-A-PCB-POWER-ONLY]  15,26 0 top
U$2  USB-POWER-ONLY  [USB-A-PCB-POWER-ONLY]  50,25.75 0 top
U$3  USB-POWER-ONLY  [USB-A-PCB-POWER-ONLY]  85,25.75 0 top
U$4  USB-POWER-ONLY  [USB-A-PCB-POWER-ONLY]  120,25.75 0 top
U$5  USB-POWER-ONLY  [USB-A-PCB-POWER-ONLY]  15,76 0 top
U$6  USB-POWER-ONLY  [USB-A-PCB-POWER-ONLY]  50,75.75 0 top
U$7  USB-POWER-ONLY  [USB-A-PCB-POWER-ONLY]  85,75.75 0 top
U$8  USB-POWER-ONLY  [USB-A-PCB-POWER-ONLY]  120,75.75 0 top
U$9  USB-POWER-ONLY  [USB-A-PCB-POWER-ONLY]  155,75.75 0 top
U$10  USB-POWER-ONLY  [USB-A-PCB-POWER-ONLY]  15,126 0 top
U$11  USB-POWER-ONLY  [USB-A-PCB-POWER-ONLY]  50,125.75 0 top
U$12  USB-POWER-ONLY  [USB-A-PCB-POWER-ONLY]  85,125.75 0 top
U$13  USB-POWER-ONLY  [USB-A-PCB-POWER-ONLY]  155,25.75 0 top
U$14  USB-POWER-ONLY  [USB-A-PCB-POWER-ONLY]  120,125.75 0 top
U$15  USB-POWER-ONLY  [USB-A-PCB-POWER-ONLY]  155,125.75 0 top
Y1  18MHZ  [RESONATOR-SMD]  24.75,39.34 180 top
Y2  18MHZ  [RESONATOR-SMD]  59.75,39.09 180 top
Y3  18MHZ  [RESONATOR-SMD]  94.75,39.09 180 top
Y4  18MHZ  [RESONATOR-SMD]  129.75,39.09 180 top
Y5  18MHZ  [RESONATOR-SMD]  24.75,89.34 180 top
Y6  18MHZ  [RESONATOR-SMD]  59.75,89.09 180 top
Y7  18MHZ  [RESONATOR-SMD]  94.75,89.09 180 top
Y8  18MHZ  [RESONATOR-SMD]  129.75,89.09 180 top
Y9  18MHZ  [RESONATOR-SMD]  164.75,89.09 180 top
Y10  18MHZ  [RESONATOR-SMD]  24.75,139.34 180 top
Y11  18MHZ  [RESONATOR-SMD]  59.75,139.09 180 top
Y12  18MHZ  [RESONATOR-SMD]  94.75,139.09 180 top
Y13  18MHZ  [RESONATOR-SMD]  164.75,39.09 180 top
Y14  18MHZ  [RESONATOR-SMD]  129.75,139.09 180 top
Y15  18MHZ  [RESONATOR-SMD]  164.75,139.09 180 top

## Library data of the parts
5V 5V1-5V14 MISO MISO1-MISO14 MOSI MOSI1-MOSI14 RST RST1-RST14 SCK SCK1-SCK14 = SparkFun-Passives
C1-C153 LED4 LED5 LED8 LED11 LED14 LED17 LED20 LED23 LED26 LED29 LED32 LED35 LED38 LED41 LED44 R1-R195 = homemade-hardware
LED1-LED3 LED6 LED7 LED9 LED10 LED12 LED13 LED15 LED16 LED18 LED19 LED21 LED22 LED24 LED25 LED27 LED28 LED30 LED31 LED33 LED34 LED36 LED37 LED39 LED40 LED42 LED43 LED45 = tvbgone
Q1-Q45 = Tomorrow_Lab_LLC
U1-U15 = SparkFun-DigitalIC; PROD_ID: IC-09069
U$1-U$15 = Andy_Sigler
Y1-Y15 = homemade-hardware; PROD_ID: XTAL-08895

## Nets
GND: C1.2 C2.2 C3.2 C4.2 C5.2 C6.2 C7.2 Q2.3-EMITTER Q9.3-EMITTER R1.1 R6.1 U1.3 U1.5 U1.21 U$1.GND Y1.2
GND2: C129.2 C130.2 C131.2 C132.2 C133.2 C134.2 C135.2 C136.2 C137.2 C138.2 C139.2 Q37.3-EMITTER Q38.3-EMITTER R157.1 R158.1 U13.3 U13.5 U13.21 U$13.GND Y13.2
GND3: C41.2 C42.2 C43.2 C44.2 C45.2 C46.2 C47.2 Q13.3-EMITTER Q14.3-EMITTER R53.1 R54.1 U5.3 U5.5 U5.21 U$5.GND Y5.2
GND4: C48.2 C49.2 C50.2 C51.2 C52.2 C53.2 C54.2 C55.2 C56.2 C57.2 C58.2 Q16.3-EMITTER Q17.3-EMITTER R66.1 R67.1 U6.3 U6.5 U6.21 U$6.GND Y6.2
GND5: C59.2 C60.2 C61.2 C62.2 C63.2 C64.2 C65.2 C66.2 C67.2 C68.2 C69.2 Q19.3-EMITTER Q20.3-EMITTER R79.1 R80.1 U7.3 U7.5 U7.21 U$7.GND Y7.2
GND6: C70.2 C71.2 C72.2 C73.2 C74.2 C75.2 C76.2 C77.2 C78.2 C79.2 C80.2 Q22.3-EMITTER Q23.3-EMITTER R92.1 R93.1 U8.3 U8.5 U8.21 U$8.GND Y8.2
GND7: C81.2 C82.2 C83.2 C84.2 C85.2 C86.2 C87.2 C88.2 C89.2 C90.2 C91.2 Q25.3-EMITTER Q26.3-EMITTER R105.1 R106.1 U9.3 U9.5 U9.21 U$9.GND Y9.2
GND8: C92.2 C93.2 C94.2 C95.2 C96.2 C97.2 C98.2 Q28.3-EMITTER Q29.3-EMITTER R118.1 R119.1 U10.3 U10.5 U10.21 U$10.GND Y10.2
GND9: C99.2 C100.2 C101.2 C102.2 C103.2 C104.2 C105.2 C106.2 C107.2 C108.2 C109.2 Q31.3-EMITTER Q32.3-EMITTER R131.1 R132.1 U11.3 U11.5 U11.21 U$11.GND Y11.2
GND10: C110.2 C111.2 C112.2 C113.2 C114.2 C115.2 C116.2 C117.2 C118.2 C119.2 C120.2 Q34.3-EMITTER Q35.3-EMITTER R144.1 R145.1 U12.3 U12.5 U12.21 U$12.GND Y12.2
GND11: C121.2 C122.2 C123.2 C124.2 C125.2 C126.2 C127.2 C128.2 C140.2 C141.2 C142.2 Q40.3-EMITTER Q41.3-EMITTER R170.1 R171.1 U14.3 U14.5 U14.21 U$14.GND Y14.2
GND12: C143.2 C144.2 C145.2 C146.2 C147.2 C148.2 C149.2 C150.2 C151.2 C152.2 C153.2 Q43.3-EMITTER Q44.3-EMITTER R183.1 R184.1 U15.3 U15.5 U15.21 U$15.GND Y15.2
GND13: C8.2 C9.2 C10.2 C11.2 C12.2 C13.2 C14.2 C15.2 C16.2 C17.2 C18.2 Q3.3-EMITTER Q4.3-EMITTER R14.1 R15.1 U2.3 U2.5 U2.21 U$2.GND Y2.2
GND14: C19.2 C20.2 C21.2 C22.2 C23.2 C24.2 C25.2 C26.2 C27.2 C28.2 C29.2 Q6.3-EMITTER Q7.3-EMITTER R27.1 R28.1 U3.3 U3.5 U3.21 U$3.GND Y3.2
GND15: C30.2 C31.2 C32.2 C33.2 C34.2 C35.2 C36.2 C37.2 C38.2 C39.2 C40.2 Q10.3-EMITTER Q11.3-EMITTER R40.1 R41.1 U4.3 U4.5 U4.21 U$4.GND Y4.2
MISO: MISO.P$1 U1.16
MISO1: MISO1.P$1 U2.16
MISO2: MISO2.P$1 U3.16
MISO3: MISO3.P$1 U4.16
MISO4: MISO4.P$1 U5.16
MISO5: MISO5.P$1 U6.16
MISO6: MISO6.P$1 U7.16
MISO7: MISO7.P$1 U8.16
MISO8: MISO8.P$1 U9.16
MISO9: MISO9.P$1 U10.16
MISO10: MISO10.P$1 U11.16
MISO11: MISO11.P$1 U12.16
MISO12: MISO12.P$1 U13.16
MISO13: MISO13.P$1 U14.16
MISO14: MISO14.P$1 U15.16
MOSI: MOSI.P$1 U1.15
MOSI1: MOSI1.P$1 U2.15
MOSI2: MOSI2.P$1 U3.15
MOSI3: MOSI3.P$1 U4.15
MOSI4: MOSI4.P$1 U5.15
MOSI5: MOSI5.P$1 U6.15
MOSI6: MOSI6.P$1 U7.15
MOSI7: MOSI7.P$1 U8.15
MOSI8: MOSI8.P$1 U9.15
MOSI9: MOSI9.P$1 U10.15
MOSI10: MOSI10.P$1 U11.15
MOSI11: MOSI11.P$1 U12.15
MOSI12: MOSI12.P$1 U13.15
MOSI13: MOSI13.P$1 U14.15
MOSI14: MOSI14.P$1 U15.15
N$1: U1.8 Y1.3
N$2: U1.7 Y1.1
N$3: LED4.C R1.2
N$4: Q2.2-COLLECTOR R9.1 R10.1 R11.1 R12.1 R13.1
N$5: U2.8 Y2.3
N$6: Q1.1-BASE U1.1
N$7: U2.7 Y2.1
N$8: LED1.K R9.2 R10.2 R11.2 R12.2 R13.2
N$9: Q5.1-BASE U2.1
N$10: LED4.A Q1.3-EMITTER Q2.1-BASE Q9.1-BASE R6.2
N$11: Q9.2-COLLECTOR R2.1 R3.1 R4.1 R7.1 R8.1
N$12: LED3.K R2.2 R3.2 R4.2 R7.2 R8.2
N$13: LED5.A Q3.1-BASE Q4.1-BASE Q5.3-EMITTER R14.2
N$14: LED5.C R15.2
N$15: Q3.2-COLLECTOR R17.1 R18.1 R19.1 R20.1 R21.1
N$16: LED2.K R17.2 R18.2 R19.2 R20.2 R21.2
N$17: Q4.2-COLLECTOR R22.1 R23.1 R24.1 R25.1 R26.1
N$18: LED6.K R22.2 R23.2 R24.2 R25.2 R26.2
N$19: U3.8 Y3.3
N$20: U3.7 Y3.1
N$21: Q8.1-BASE U3.1
N$22: LED8.A Q6.1-BASE Q7.1-BASE Q8.3-EMITTER R27.2
N$23: LED8.C R28.2
N$24: Q6.2-COLLECTOR R30.1 R31.1 R32.1 R33.1 R34.1
N$25: LED7.K R30.2 R31.2 R32.2 R33.2 R34.2
N$26: Q7.2-COLLECTOR R35.1 R36.1 R37.1 R38.1 R39.1
N$27: LED9.K R35.2 R36.2 R37.2 R38.2 R39.2
N$28: U4.8 Y4.3
N$29: U4.7 Y4.1
N$30: Q12.1-BASE U4.1
N$31: LED11.A Q10.1-BASE Q11.1-BASE Q12.3-EMITTER R40.2
N$32: LED11.C R41.2
N$33: Q10.2-COLLECTOR R43.1 R44.1 R45.1 R46.1 R47.1
N$34: LED10.K R43.2 R44.2 R45.2 R46.2 R47.2
N$35: Q11.2-COLLECTOR R48.1 R49.1 R50.1 R51.1 R52.1
N$36: LED12.K R48.2 R49.2 R50.2 R51.2 R52.2
N$37: U5.8 Y5.3
N$38: U5.7 Y5.1
N$39: Q15.1-BASE U5.1
N$40: LED14.A Q13.1-BASE Q14.1-BASE Q15.3-EMITTER R53.2
N$41: LED14.C R54.2
N$42: Q13.2-COLLECTOR R56.1 R57.1 R58.1 R59.1 R60.1
N$43: LED13.K R56.2 R57.2 R58.2 R59.2 R60.2
N$44: Q14.2-COLLECTOR R61.1 R62.1 R63.1 R64.1 R65.1
N$45: LED15.K R61.2 R62.2 R63.2 R64.2 R65.2
N$46: U6.8 Y6.3
N$47: U6.7 Y6.1
N$48: Q18.1-BASE U6.1
N$49: LED17.A Q16.1-BASE Q17.1-BASE Q18.3-EMITTER R66.2
N$50: LED17.C R67.2
N$51: Q16.2-COLLECTOR R69.1 R70.1 R71.1 R72.1 R73.1
N$52: LED16.K R69.2 R70.2 R71.2 R72.2 R73.2
N$53: Q17.2-COLLECTOR R74.1 R75.1 R76.1 R77.1 R78.1
N$54: LED18.K R74.2 R75.2 R76.2 R77.2 R78.2
N$55: U7.8 Y7.3
N$56: U7.7 Y7.1
N$57: Q21.1-BASE U7.1
N$58: LED20.A Q19.1-BASE Q20.1-BASE Q21.3-EMITTER R79.2
N$59: LED20.C R80.2
N$60: Q19.2-COLLECTOR R82.1 R83.1 R84.1 R85.1 R86.1
N$61: LED19.K R82.2 R83.2 R84.2 R85.2 R86.2
N$62: Q20.2-COLLECTOR R87.1 R88.1 R89.1 R90.1 R91.1
N$63: LED21.K R87.2 R88.2 R89.2 R90.2 R91.2
N$64: U8.8 Y8.3
N$65: U8.7 Y8.1
N$66: Q24.1-BASE U8.1
N$67: LED23.A Q22.1-BASE Q23.1-BASE Q24.3-EMITTER R92.2
N$68: LED23.C R93.2
N$69: Q22.2-COLLECTOR R95.1 R96.1 R97.1 R98.1 R99.1
N$70: LED22.K R95.2 R96.2 R97.2 R98.2 R99.2
N$71: Q23.2-COLLECTOR R100.1 R101.1 R102.1 R103.1 R104.1
N$72: LED24.K R100.2 R101.2 R102.2 R103.2 R104.2
N$73: U9.8 Y9.3
N$74: U9.7 Y9.1
N$75: Q27.1-BASE U9.1
N$76: LED26.A Q25.1-BASE Q26.1-BASE Q27.3-EMITTER R105.2
N$77: LED26.C R106.2
N$78: Q25.2-COLLECTOR R108.1 R109.1 R110.1 R111.1 R112.1
N$79: LED25.K R108.2 R109.2 R110.2 R111.2 R112.2
N$80: Q26.2-COLLECTOR R113.1 R114.1 R115.1 R116.1 R117.1
N$81: LED27.K R113.2 R114.2 R115.2 R116.2 R117.2
N$82: U10.8 Y10.3
N$83: U10.7 Y10.1
N$84: Q30.1-BASE U10.1
N$85: LED29.A Q28.1-BASE Q29.1-BASE Q30.3-EMITTER R118.2
N$86: LED29.C R119.2
N$87: Q28.2-COLLECTOR R121.1 R122.1 R123.1 R124.1 R125.1
N$88: LED28.K R121.2 R122.2 R123.2 R124.2 R125.2
N$89: Q29.2-COLLECTOR R126.1 R127.1 R128.1 R129.1 R130.1
N$90: LED30.K R126.2 R127.2 R128.2 R129.2 R130.2
N$91: U11.8 Y11.3
N$92: U11.7 Y11.1
N$93: Q33.1-BASE U11.1
N$94: LED32.A Q31.1-BASE Q32.1-BASE Q33.3-EMITTER R131.2
N$95: LED32.C R132.2
N$96: Q31.2-COLLECTOR R134.1 R135.1 R136.1 R137.1 R138.1
N$97: LED31.K R134.2 R135.2 R136.2 R137.2 R138.2
N$98: Q32.2-COLLECTOR R139.1 R140.1 R141.1 R142.1 R143.1
N$99: LED33.K R139.2 R140.2 R141.2 R142.2 R143.2
N$100: U12.8 Y12.3
N$101: U12.7 Y12.1
N$102: Q36.1-BASE U12.1
N$103: LED35.A Q34.1-BASE Q35.1-BASE Q36.3-EMITTER R144.2
N$104: LED35.C R145.2
N$105: Q34.2-COLLECTOR R147.1 R148.1 R149.1 R150.1 R151.1
N$106: LED34.K R147.2 R148.2 R149.2 R150.2 R151.2
N$107: Q35.2-COLLECTOR R152.1 R153.1 R154.1 R155.1 R156.1
N$108: LED36.K R152.2 R153.2 R154.2 R155.2 R156.2
N$109: U13.8 Y13.3
N$110: U13.7 Y13.1
N$111: Q39.1-BASE U13.1
N$112: LED38.A Q37.1-BASE Q38.1-BASE Q39.3-EMITTER R157.2
N$113: LED38.C R158.2
N$114: Q37.2-COLLECTOR R160.1 R161.1 R162.1 R163.1 R164.1
N$115: LED37.K R160.2 R161.2 R162.2 R163.2 R164.2
N$116: Q38.2-COLLECTOR R165.1 R166.1 R167.1 R168.1 R169.1
N$117: LED39.K R165.2 R166.2 R167.2 R168.2 R169.2
N$118: U14.8 Y14.3
N$119: U14.7 Y14.1
N$120: Q42.1-BASE U14.1
N$121: LED41.A Q40.1-BASE Q41.1-BASE Q42.3-EMITTER R170.2
N$122: LED41.C R171.2
N$123: Q40.2-COLLECTOR R173.1 R174.1 R175.1 R176.1 R177.1
N$124: LED40.K R173.2 R174.2 R175.2 R176.2 R177.2
N$125: Q41.2-COLLECTOR R178.1 R179.1 R180.1 R181.1 R182.1
N$126: LED42.K R178.2 R179.2 R180.2 R181.2 R182.2
N$127: U15.8 Y15.3
N$128: U15.7 Y15.1
N$129: Q45.1-BASE U15.1
N$130: LED44.A Q43.1-BASE Q44.1-BASE Q45.3-EMITTER R183.2
N$131: LED44.C R184.2
N$132: Q43.2-COLLECTOR R186.1 R187.1 R188.1 R189.1 R190.1
N$133: LED43.K R186.2 R187.2 R188.2 R189.2 R190.2
N$134: Q44.2-COLLECTOR R191.1 R192.1 R193.1 R194.1 R195.1
N$135: LED45.K R191.2 R192.2 R193.2 R194.2 R195.2
RST: R5.2 RST.P$1 U1.29
RST1: R16.2 RST1.P$1 U2.29
RST2: R29.2 RST2.P$1 U3.29
RST3: R42.2 RST3.P$1 U4.29
RST4: R55.2 RST4.P$1 U5.29
RST5: R68.2 RST5.P$1 U6.29
RST6: R81.2 RST6.P$1 U7.29
RST7: R94.2 RST7.P$1 U8.29
RST8: R107.2 RST8.P$1 U9.29
RST9: R120.2 RST9.P$1 U10.29
RST10: R133.2 RST10.P$1 U11.29
RST11: R146.2 RST11.P$1 U12.29
RST12: R159.2 RST12.P$1 U13.29
RST13: R172.2 RST13.P$1 U14.29
RST14: R185.2 RST14.P$1 U15.29
SCK: SCK.P$1 U1.17
SCK1: SCK1.P$1 U2.17
SCK2: SCK2.P$1 U3.17
SCK3: SCK3.P$1 U4.17
SCK4: SCK4.P$1 U5.17
SCK5: SCK5.P$1 U6.17
SCK6: SCK6.P$1 U7.17
SCK7: SCK7.P$1 U8.17
SCK8: SCK8.P$1 U9.17
SCK9: SCK9.P$1 U10.17
SCK10: SCK10.P$1 U11.17
SCK11: SCK11.P$1 U12.17
SCK12: SCK12.P$1 U13.17
SCK13: SCK13.P$1 U14.17
SCK14: SCK14.P$1 U15.17
VCC: 5V.P$1 C1.1 C2.1 C3.1 C4.1 C5.1 C6.1 C7.1 LED1.A LED3.A Q1.2-COLLECTOR R5.1 U1.4 U1.6 U1.18 U$1.5V
VCC1: 5V1.P$1 C8.1 C9.1 C10.1 C11.1 C12.1 C13.1 C14.1 C15.1 C16.1 C17.1 C18.1 LED2.A LED6.A Q5.2-COLLECTOR R16.1 U2.4 U2.6 U2.18 U$2.5V
VCC2: 5V2.P$1 C19.1 C20.1 C21.1 C22.1 C23.1 C24.1 C25.1 C26.1 C27.1 C28.1 C29.1 LED7.A LED9.A Q8.2-COLLECTOR R29.1 U3.4 U3.6 U3.18 U$3.5V
VCC3: 5V3.P$1 C30.1 C31.1 C32.1 C33.1 C34.1 C35.1 C36.1 C37.1 C38.1 C39.1 C40.1 LED10.A LED12.A Q12.2-COLLECTOR R42.1 U4.4 U4.6 U4.18 U$4.5V
VCC4: 5V4.P$1 C41.1 C42.1 C43.1 C44.1 C45.1 C46.1 C47.1 LED13.A LED15.A Q15.2-COLLECTOR R55.1 U5.4 U5.6 U5.18 U$5.5V
VCC5: 5V5.P$1 C48.1 C49.1 C50.1 C51.1 C52.1 C53.1 C54.1 C55.1 C56.1 C57.1 C58.1 LED16.A LED18.A Q18.2-COLLECTOR R68.1 U6.4 U6.6 U6.18 U$6.5V
VCC6: 5V6.P$1 C59.1 C60.1 C61.1 C62.1 C63.1 C64.1 C65.1 C66.1 C67.1 C68.1 C69.1 LED19.A LED21.A Q21.2-COLLECTOR R81.1 U7.4 U7.6 U7.18 U$7.5V
VCC7: 5V7.P$1 C70.1 C71.1 C72.1 C73.1 C74.1 C75.1 C76.1 C77.1 C78.1 C79.1 C80.1 LED22.A LED24.A Q24.2-COLLECTOR R94.1 U8.4 U8.6 U8.18 U$8.5V
VCC8: 5V8.P$1 C81.1 C82.1 C83.1 C84.1 C85.1 C86.1 C87.1 C88.1 C89.1 C90.1 C91.1 LED25.A LED27.A Q27.2-COLLECTOR R107.1 U9.4 U9.6 U9.18 U$9.5V
VCC9: 5V9.P$1 C92.1 C93.1 C94.1 C95.1 C96.1 C97.1 C98.1 LED28.A LED30.A Q30.2-COLLECTOR R120.1 U10.4 U10.6 U10.18 U$10.5V
VCC10: 5V10.P$1 C99.1 C100.1 C101.1 C102.1 C103.1 C104.1 C105.1 C106.1 C107.1 C108.1 C109.1 LED31.A LED33.A Q33.2-COLLECTOR R133.1 U11.4 U11.6 U11.18 U$11.5V
VCC11: 5V11.P$1 C110.1 C111.1 C112.1 C113.1 C114.1 C115.1 C116.1 C117.1 C118.1 C119.1 C120.1 LED34.A LED36.A Q36.2-COLLECTOR R146.1 U12.4 U12.6 U12.18 U$12.5V
VCC12: 5V12.P$1 C129.1 C130.1 C131.1 C132.1 C133.1 C134.1 C135.1 C136.1 C137.1 C138.1 C139.1 LED37.A LED39.A Q39.2-COLLECTOR R159.1 U13.4 U13.6 U13.18 U$13.5V
VCC13: 5V13.P$1 C121.1 C122.1 C123.1 C124.1 C125.1 C126.1 C127.1 C128.1 C140.1 C141.1 C142.1 LED40.A LED42.A Q42.2-COLLECTOR R172.1 U14.4 U14.6 U14.18 U$14.5V
VCC14: 5V14.P$1 C143.1 C144.1 C145.1 C146.1 C147.1 C148.1 C149.1 C150.1 C151.1 C152.1 C153.1 LED43.A LED45.A Q45.2-COLLECTOR R185.1 U15.4 U15.6 U15.18 U$15.5V